# Altium PCB PCB_PicoAdapterGB_Pads.pcbdoc
Units mm, origin at the board's own origin, x right, y up, seen from the top; angles counter-clockwise.
Board outline 66.35 x 174.81 mm, 2 copper layers (Top Layer, Bottom Layer); 7 components, 18 nets, 72 pads, 1 vias.
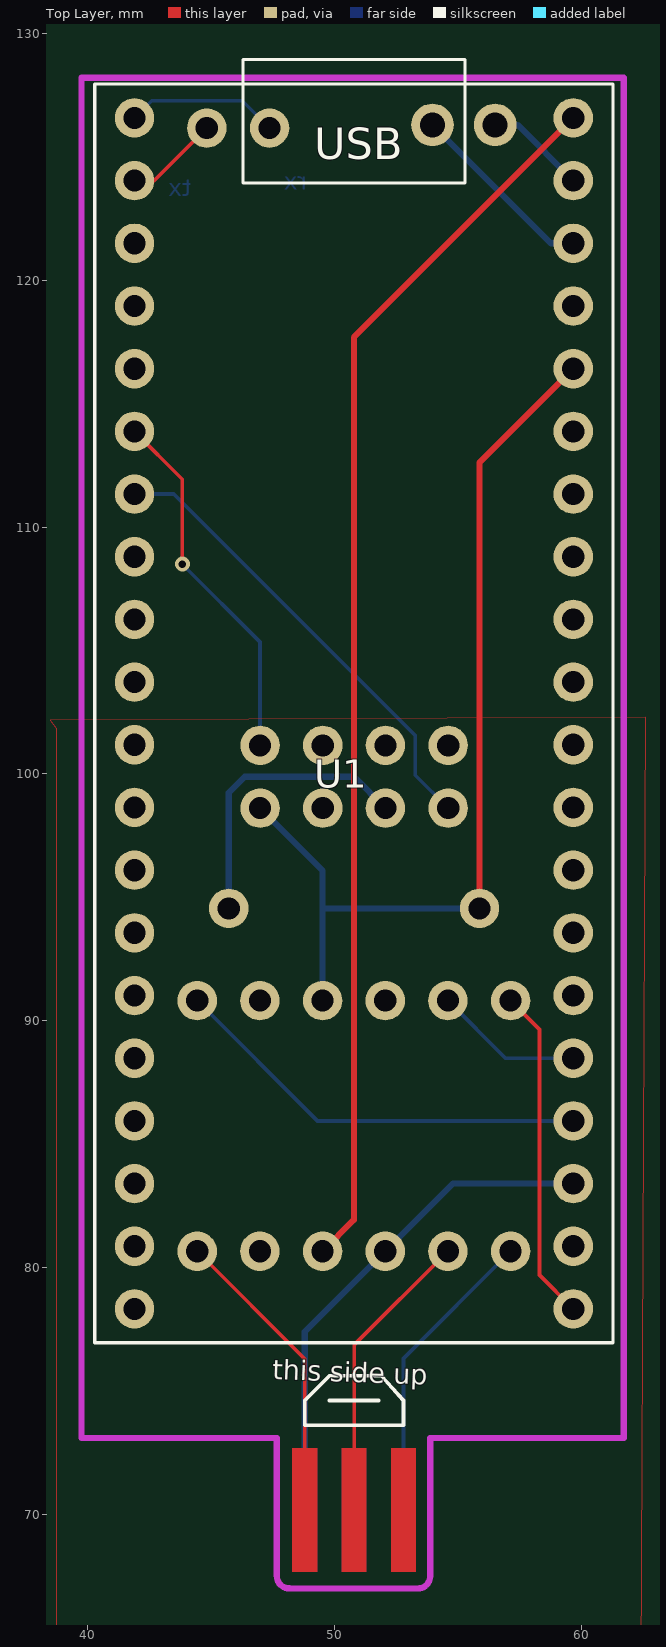
[diagram p0: Top Layer view]
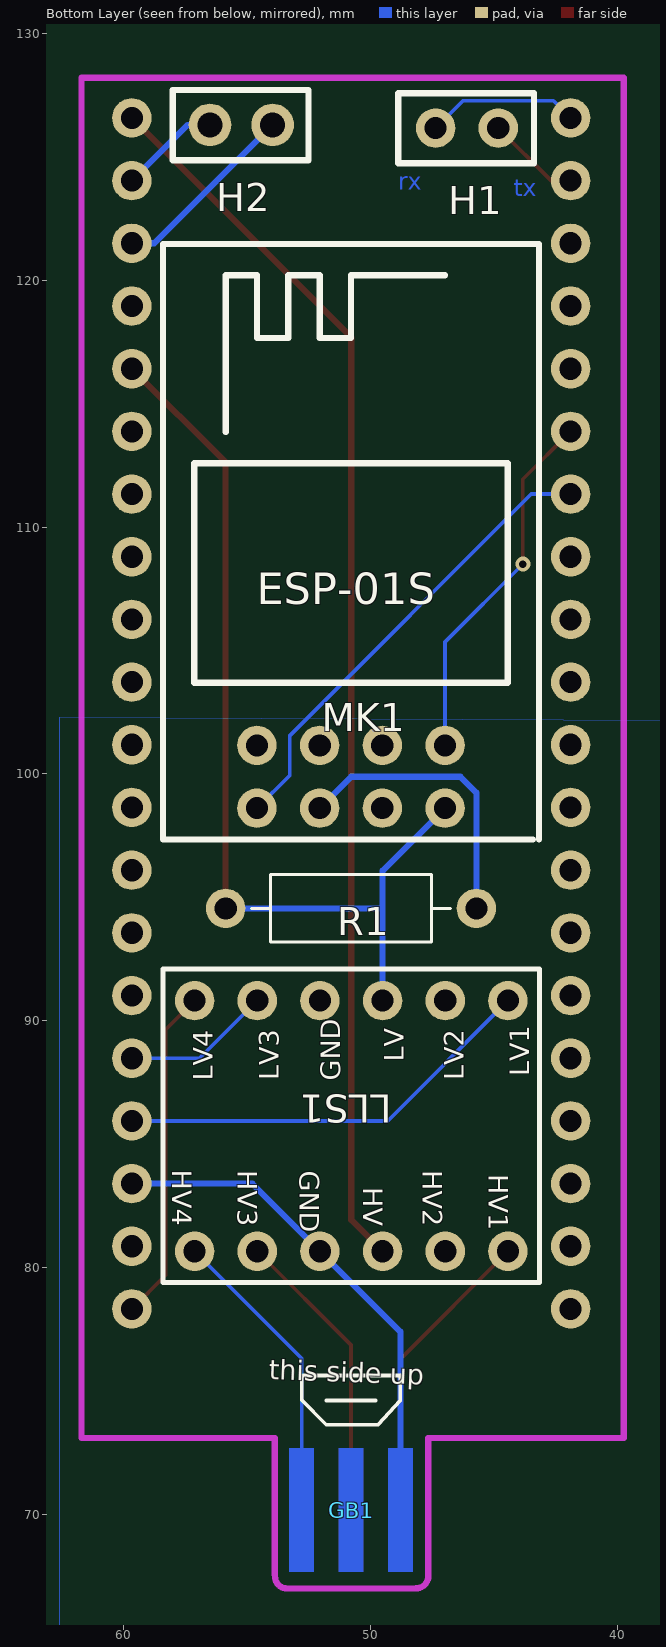
[diagram p1: Bottom Layer view, seen from below]

## Layer stack, top to bottom
Top Layer: signal copper (thickness not stored)
Dielectric: dielectric 0.32, FR-4, Dk 4.8
Bottom Layer: signal copper (thickness not stored)

## Board outline
91.751,25.4 25.4,25.4 25.4,200.21 91.751,200.21

## Components (designator, comment, footprint, x,y, rotation, side; value= is the part's Value field where it differs from the comment)
GB1 "gb-link-socket" GB-LINK-SOCKET 50.8,70.168 r0 bottom
H1 "1x2_Male_Pin_Header" 1X2/2.54_MALE_PIN_HEADER#1 61.341,112.204 r0 bottom
H2 "1x2_Male_Pin_Header" 1X2/2.54_MALE_PIN_HEADER#2 55.245,127.572 r0 bottom
LLS1 "Logical_Level_Shifter_Bidirectional" "LOGIC_LEVEL BIDIRECTIONAL" 43.18,92.138 r90 bottom
MK1 "ESP-01S_C82893" WIRELM-TH_ESP-01S 50.8,99.885 r0 bottom
R1 "10k Resistor" R_AXIAL_DIN0207_L6.3MM_D2.5MM_P10.16MM_HORIZONTAL 49.53,95.822 r90 bottom
U1 "Raspberry Pi Pico" FT_RASPBERRY-PI-PICO_TH 50.45,102.552 r0 top

## Footprints (in the part's own frame and the unit in brackets; to place one, negate y for a bottom-side part, rotate by r counter-clockwise, add the part's x,y. Pads: shape width x height; smd on the part's side, far side on the other; paste and mask are expansions set on the pad)
1X2/2.54_MALE_PIN_HEADER#1 [mm]
  round 1.6 hole 0.9: 1(-13.97,-13.97) 2(-16.51,-13.97)
  silkscreen extent -17.96,-15.38 -12.46,-12.54
1X2/2.54_MALE_PIN_HEADER#2 [mm]
  round 1.727 hole 1.016: 1(1.27,1.27) 2(-1.27,1.27)
  silkscreen extent -2.72,-0.14 2.78,2.7
FT_RASPBERRY-PI-PICO_TH [mm]
  round 1.6 hole 0.9: 1(-8.55,24.03) 2(-8.55,21.49) 3(-8.55,18.95) 4(-8.55,16.41) 5(-8.55,13.87) 6(-8.55,11.33) 7(-8.55,8.79) 8(-8.55,6.25) 9(-8.55,3.71) 10(-8.55,1.17) 11(-8.55,-1.37) 12(-8.55,-3.91) 13(-8.55,-6.45) 14(-8.55,-8.99) 15(-8.55,-11.53) 16(-8.55,-14.07) 17(-8.55,-16.61) 18(-8.55,-19.15) 19(-8.55,-21.69) 20(-8.55,-24.23) 21(9.23,-24.23) 22(9.23,-21.69) 23(9.23,-19.15) 24(9.23,-16.61) 25(9.23,-14.07) 26(9.23,-11.53) 27(9.23,-8.99) 28(9.23,-6.45) 29(9.23,-3.91) 30(9.23,-1.37) 31(9.23,1.17) 32(9.23,3.71) 33(9.23,6.25) 34(9.23,8.79) 35(9.23,11.33) 36(9.23,13.87) 37(9.23,16.41) 38(9.23,18.95) 39(9.23,21.49) 40(9.23,24.03)
  silkscreen extent -10.16,-25.6 10.84,26.4
GB-LINK-SOCKET [mm]
  round 0 smd far side: 1(2,0) 3(0,0) 5(-2,0)
  round 0 smd: 2(2,0) 4(0,0) 6(-2,0)
  Top Layer region: 2.5,-2.5 1.5,-2.5 1.5,2.5 2.5,2.5
  Top Layer region: 0.5,-2.5 -0.5,-2.5 -0.5,2.5 0.5,2.5
  Top Layer region: -1.5,-2.5 -2.5,-2.5 -2.5,2.5 -1.5,2.5
  Bottom Layer region: -1.5,-2.5 -2.5,-2.5 -2.5,2.5 -1.5,2.5
  Bottom Layer region: 0.5,-2.5 -0.5,-2.5 -0.5,2.5 0.5,2.5
  Bottom Layer region: 2.5,-2.5 1.5,-2.5 1.5,2.5 2.5,2.5
"LOGIC_LEVEL BIDIRECTIONAL" [mm]
  round 1.6 hole 0.9: 1(-11.481,1.26) 2(-11.481,3.8) 3(-11.481,6.34) 4(-11.481,8.88) 5(-11.481,11.42) 6(-11.481,13.96) 7(-1.321,13.96) 8(-1.321,11.42) 9(-1.321,8.88) 10(-1.321,6.34) 11(-1.321,3.8) 12(-1.321,1.26)
  silkscreen extent -12.75,-0.01 -0.05,15.23
R_AXIAL_DIN0207_L6.3MM_D2.5MM_P10.16MM_HORIZONTAL [mm]
  round 1.6 hole 0.9: 1(-1.27,6.35) 2(-1.27,-3.81)
  silkscreen extent -2.64,-2.77 0.1,5.31
WIRELM-TH_ESP-01S [mm]
  round 1.6 hole 0.9: 1(3.81,-1.27) 2(1.27,-1.27) 3(-1.27,-1.27) 4(-3.81,-1.27) 5(-3.81,1.27) 6(-1.27,1.27) 7(1.27,1.27) 8(3.81,1.27)
  silkscreen extent -7.62,-21.59 7.62,2.54

## Via types
v1: diameter 0.61, hole 0.305, Top Layer to Bottom Layer, tented both sides, 1 vias

## Nets (pads, with @x,y where several pads share a name; then routed paths per layer and width w, separated by ;. In a path a pad name is that pad's centre, name@x,y a point inside that pad or via, vN(x,y) a via of type N, cw(c..) or ccw(c..) an arc to the next point about the centre after c; other vN are vias at no path point)
3V3: LLS1.10 MK1.5 R1.1 U1.36 | length 38.7
  Top Layer w0.25: R1.1 55.88,112.622 U1.36
  Bottom Layer w0.25: MK1.5 49.52,96.086 49.52,94.552 ; LLS1.10 49.52,94.552 ; R1.1 49.52,94.552
5V: LLS1.3 U1.40 | length 50.1
  Top Layer w0.25: LLS1.3 50.79,81.928 50.79,117.692 U1.40
BAT+: H2.1 U1.39 | length 4.1
  Bottom Layer w0.25: H2.1 57.421,126.301 U1.39
BAT-: H2.2 U1.38 | length 7.7
  Bottom Layer w0.25: H2.2 58.774,121.502 U1.38
GBGND: GB1.6 LLS1.4 U1.23 | length 20.6
  Bottom Layer w0.25: GB1.6 48.8,77.398 LLS1.4 54.805,83.402 U1.23
GBSC: GB1.5 LLS1.1 | length 12.3
  Top Layer w0.152: LLS1.1 48.8,76.298 GB1.5
GBSI: GB1.3 LLS1.5 | length 12.1
  Top Layer w0.152: GB1.3 50.8,76.858 LLS1.5
GBSO: GB1.2 LLS1.6 | length 12.3
  Bottom Layer w0.152: GB1.2 52.8,76.318 LLS1.6
GND: LLS1.9 MK1.1 U1.13 U1.18 U1.28
MK1_7: MK1.7 R1.2 | length 11.8
  Bottom Layer w0.25: R1.2 45.72,99.239 46.367,99.885 50.8,99.885 MK1.7
PROBERX: H1.2 U1.2 | length 3.8
  Top Layer w0.152: U1.2 42.699,124.042 H1.2
PROBETX: H1.1 U1.1 | length 6.2
  Bottom Layer w0.152: U1.1 42.6,127.283 46.263,127.283 H1.1
RXPIN: MK1.4 U1.6 | length 14.8
  Top Layer w0.152: U1.6 43.838,111.944 v1(43.838,108.5)
  Bottom Layer w0.152: v1(43.838,108.5) 46.99,105.348 MK1.4
S$36638: 
SPICLK: LLS1.12 U1.24 | length 17.3
  Bottom Layer w0.152: LLS1.12 49.315,85.942 U1.24
SPISI: LLS1.8 U1.25 | length 6
  Bottom Layer w0.152: LLS1.8 56.935,88.482 U1.25
SPISO: LLS1.7 U1.21 | length 13.5
  Top Layer w0.152: LLS1.7 58.308,89.65 58.308,79.695 U1.21
TXPIN: MK1.8 U1.7 | length 18.9
  Bottom Layer w0.152: U1.7 43.494,111.342 53.278,101.558 53.278,99.948 MK1.8
pads on no net: GB1.1 GB1.4 LLS1.2 LLS1.11 MK1.2 MK1.3 MK1.6 U1.3 U1.4 U1.5 U1.8 U1.9 U1.10 U1.11 U1.12 U1.14 U1.15 U1.16 U1.17 U1.19 U1.20 U1.22 U1.26 U1.27 U1.29 U1.30 U1.31 U1.32 U1.33 U1.34 U1.35 U1.37

## Polygon pours and split planes (outlines as drawn)
GND on Bottom Layer (solid): 38.1,102.171 38.227,101.663 38.227,45.657 45.085,38.798 45.339,38.798 45.466,38.925 59.817,38.925 64.897,44.005 64.897,44.133 62.611,46.419 62.611,102.298
GND on Top Layer (solid): 38.481,102.171 38.735,101.854 38.735,46.228 46.736,38.227 46.736,38.1 46.863,38.227 56.515,38.227 63.627,45.339 62.357,46.609 62.611,102.298

## Keep-outs
Keep-Out Layer:
  lines w0.254: 47.666,67.5 ccw(c48.166,67.5) 48.166,67 ; 53.381,66.993 ccw(c53.381,67.492) 53.881,67.493

## Other copper
Bottom Layer:
  text "rx" at 48.895,123.666 h0.7
  text "tx" at 44.196,123.412 h0.7

## Silkscreen, mask and mechanical layers (free items; w line width, h text height)
Top Overlay:
  lines w0.15: 49.8,74.612 51.8,74.612 ; 48.8,73.613 48.8,74.612 49.8,75.612 51.9,75.612 52.8,74.612 52.8,73.613 48.8,73.613
  text "this side up" at 47.474,75.483 h0.8 r358
Bottom Overlay:
  lines w0.15: 49.8,74.612 51.8,74.612 ; 48.8,74.629 49.7,73.629 51.8,73.629 52.8,74.629 52.8,75.629 48.8,75.629 48.8,74.629
  text "LV" at 48.653,88.328 h0.8 r270
  text "LV1" at 43.573,87.749 h0.8 r270
  text "LV2" at 46.24,87.586 h0.8 r270
  text "GND" at 51.231,87.566 h0.8 r270
  text "LV3" at 53.733,87.586 h0.8 r270
  text "LV4" at 56.4,87.566 h0.8 r270
  text "HV4" at 58.051,83.965 h0.8 r90
  text "HV2" at 47.891,83.947 h0.8 r90
  text "HV3" at 55.384,83.947 h0.8 r90
  text "GND" at 52.882,83.929 h0.8 r90
  text "HV1" at 45.224,83.783 h0.8 r90
  text "HV" at 50.304,83.248 h0.8 r90
  text "this side up" at 54.126,75.483 h0.8 r2

## Text inside footprints (layer, text, board x,y; h text height)
MK1: Bottom Overlay "ESP-01S" at 54.61,106.87 h1.27
U1: Top Overlay "USB" at 49.18,124.904 h1.27